# Altium PCB HeatSink.PcbDoc
Units mm, origin at the board's own origin, x right, y up, seen from the top; angles counter-clockwise.
Board outline 150 x 96 mm, 2 copper layers (Top Layer, Bottom Layer); 10 components, 9 nets, 45 pads, 10 vias.
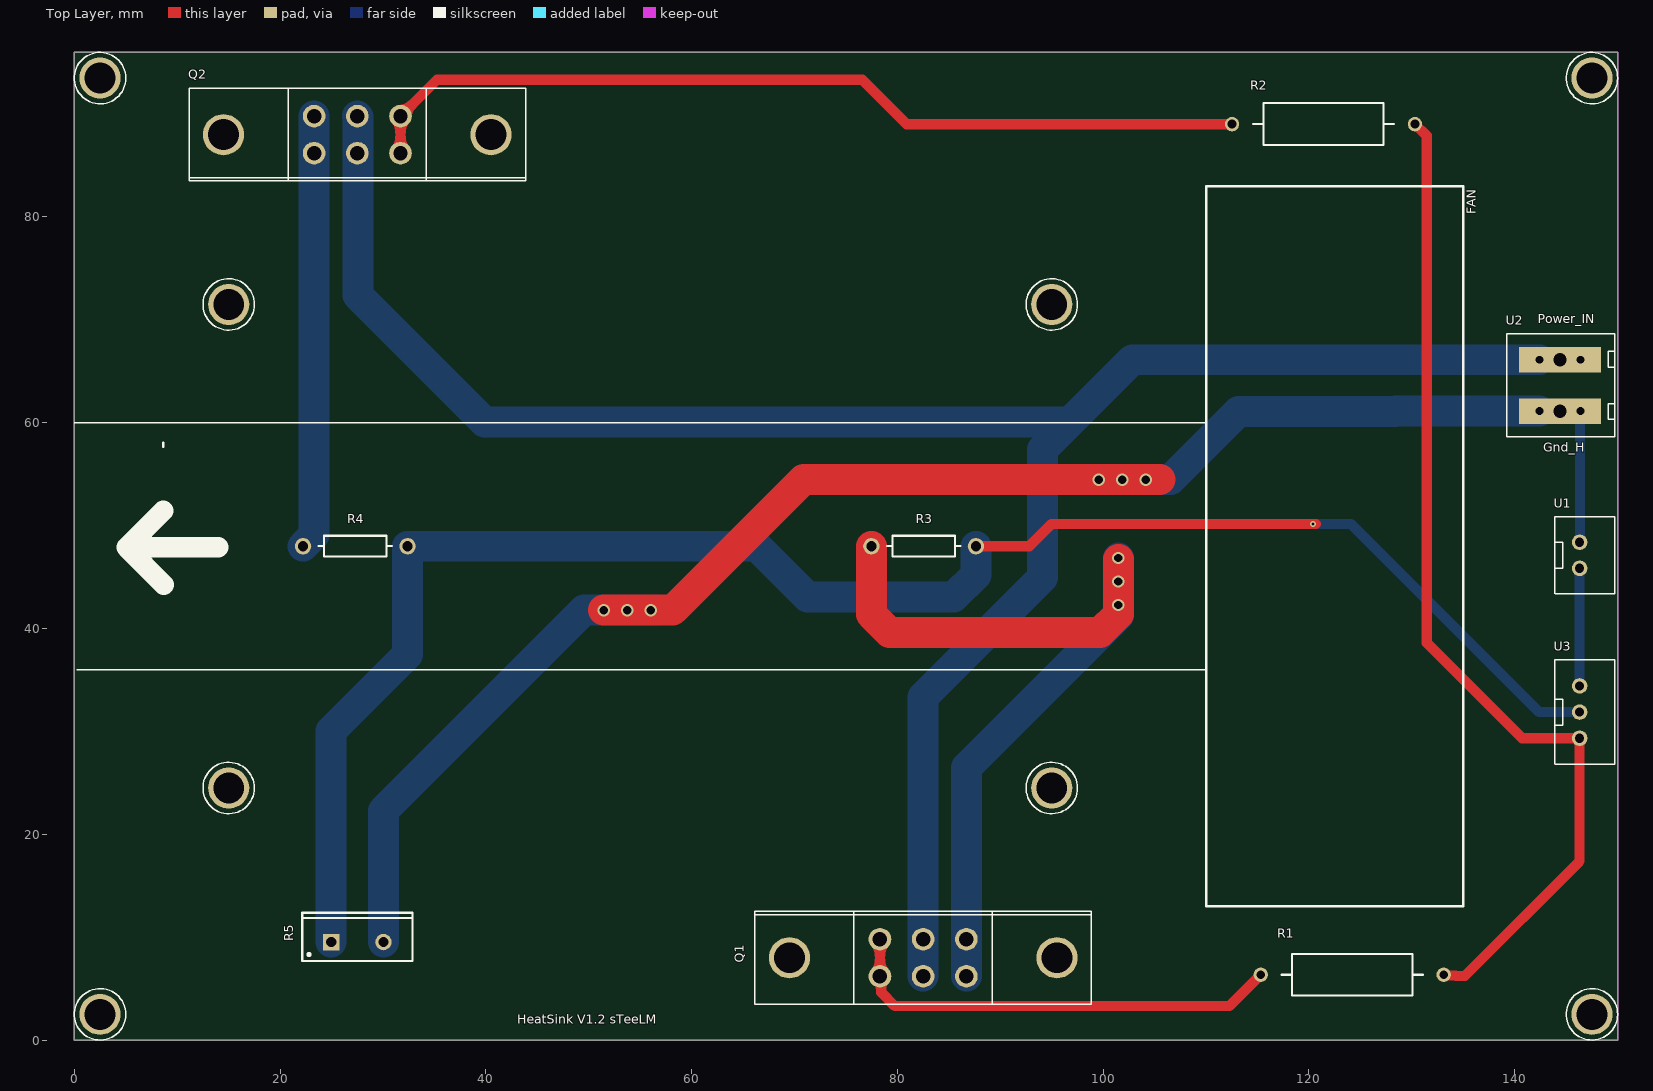
[diagram p0: Top Layer view]
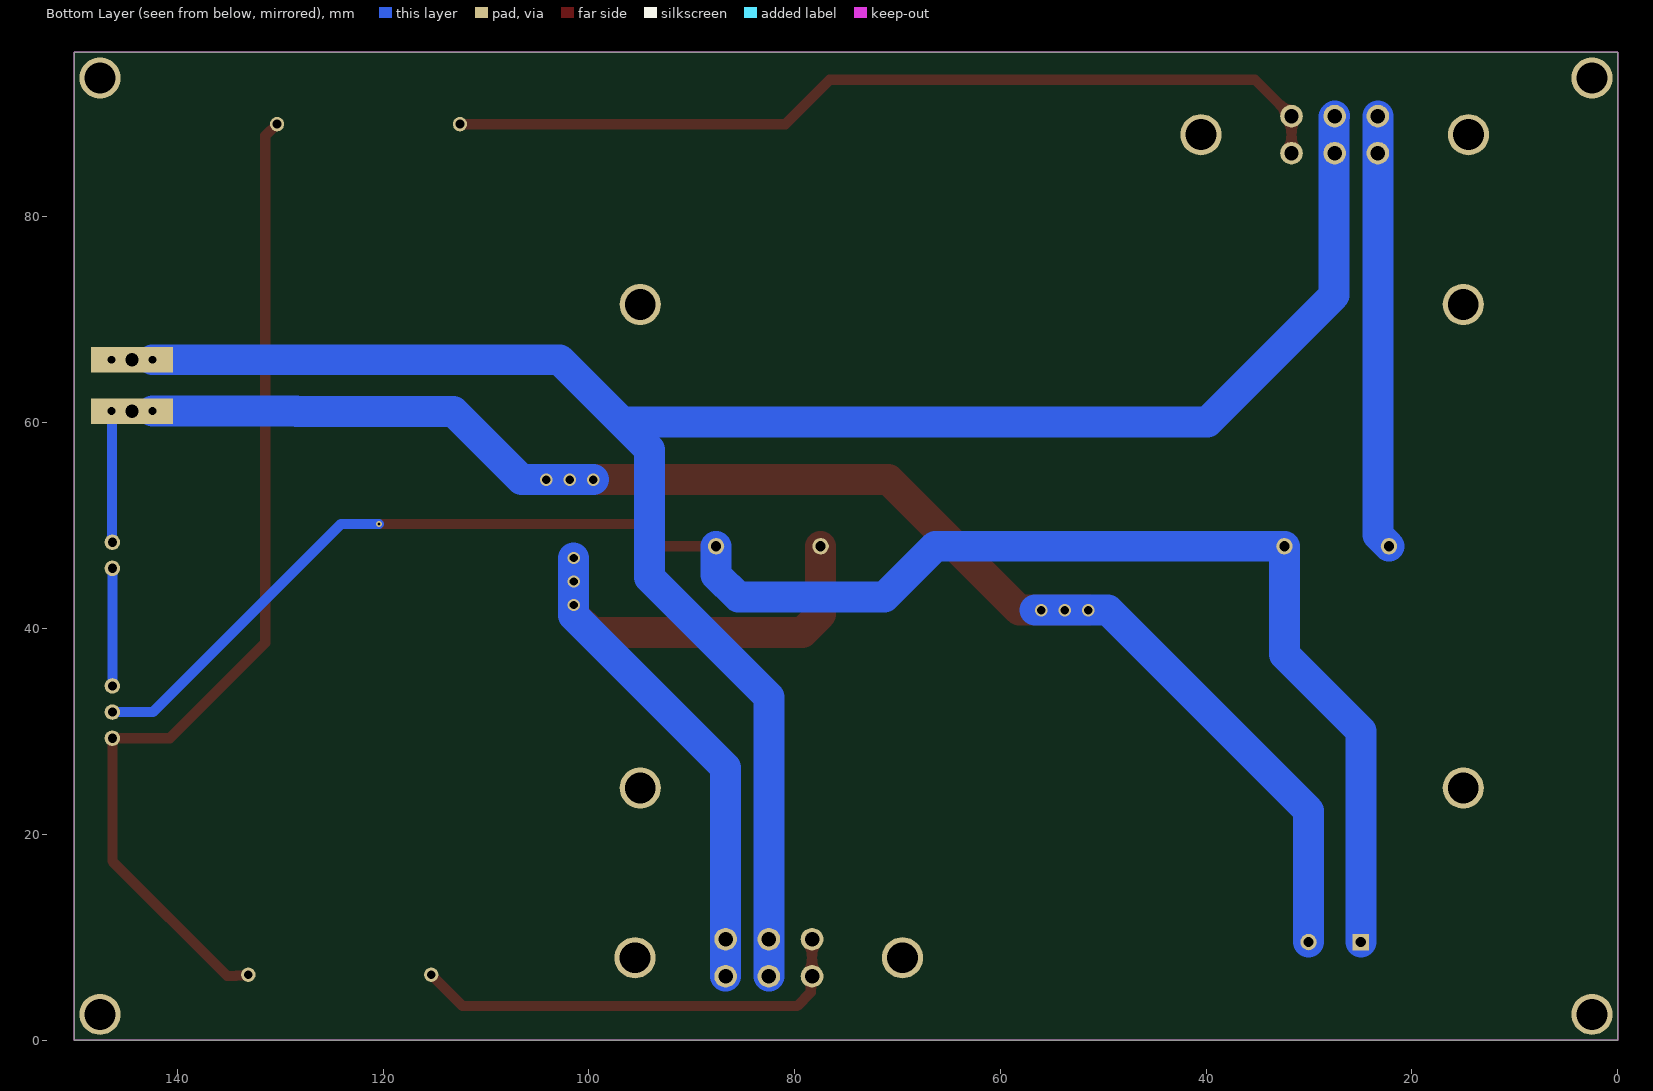
[diagram p1: Bottom Layer view, seen from below]

## Layer stack, top to bottom
Top Solder: solder mask 0.0102, Solder Resist, Dk 3.5
Top Layer: signal copper 0.0356
Dielectric 1: dielectric 0.32, FR-4, Dk 4.8
Bottom Layer: signal copper 0.0356
Bottom Solder: solder mask 0.0102, Solder Resist, Dk 3.5

## Board outline
0,0 0,96 150,96 150,0

## Design rules (kind name [scope] priority, off if disabled: settings)
Clearance [All] p1: gap=1 ignorepadtopadclearanceinfootprint=FALSE except(0.254: Arc-THPad Arc-Hole Track-THPad Track-Hole SMDPad-THPad SMDPad-Hole THPad-THPad THPad-Via THPad-Fill THPad-Poly THPad-Region THPad-Text THPad-Hole Via-Hole Fill-Hole Poly-Hole Region-Hole Text-Hole)
HoleSize [All] p1: absolutevalues=TRUE maxlimit=3 minlimit=0.025 maxpercent=80.000 minpercent=20.000
PolygonConnect [All] p1: connectstyle=Relief reliefconductorwidth=0.254 reliefentries=4 polygonreliefangle="90 Angle" airgapwidth=0.254
RoutingVias [All] p1: holewidth=0.711 width=1.27 viastyle="Through Hole" minholewidth=0.711 minwidth=1.27 maxholewidth=0.711 maxwidth=1.27
SolderMaskExpansion [All] p1: expansion=0.102 istentingtop=FALSE
Width [All] p1: maxlimit=4 minlimit=0.254 preferedwidth=1
29 further rules are at their usual default settings.

## Components (designator, comment, footprint, x,y, rotation, side; value= is the part's Value field where it differs from the comment)
Q1 "TIP3055" TO-247-ZUO 82.5,8 r0 top
Q2 "TIP3055" TO-247-ZUO 27.5,88 r180 top
R1 "1W" AXIAL-0.7 124.206,6.35 r0 top value=200
R2 "1W" AXIAL-0.7 121.412,89.027 r0 top value=200
R3 "5W" AXIAL-0.4-BigHole 82.55,48 r0 top value=0.22R
R4 "5W" AXIAL-0.4-BigHole 27.305,48 r0 top value=0.22R
R5 "35W" "TO-220AB - 2 Legs" 27.5,9.525 r0 top value=0.4R
U1 "NTC" X254-2P 146.304,47.117 r90 top
U2 "POWER2" KF128-50-2P 144.399,63.627 r270 top
U3 "REG3" X254-3P 146.304,31.877 r90 top

## Footprints (in the part's own frame and the unit in brackets; to place one, negate y for a bottom-side part, rotate by r counter-clockwise, add the part's x,y. Pads: shape width x height; smd on the part's side, far side on the other; paste and mask are expansions set on the pad)
AXIAL-0.4-BigHole [mm] "Axial Device, Thru-Hole; 2 Leads; 0.4 in Pin Spacing"
  round 1.6 hole 1: 1(-5.08,0) 2(5.08,0)
  silkscreen extent -3.56,-1.02 3.56,1.02
AXIAL-0.7 [mm] "Axial Device, Thru-Hole; 2 Leads; 0.7 in Pin Spacing"
  round 1.4 hole 0.85: 1(-8.89,0) 2(8.89,0)
  silkscreen extent -6.86,-2.03 6.86,2.03, body extent -7.35,-2.41 7.35,2.39, height 4.9
KF128-50-2P [mm] "KF128-50-2P"
  round 1.524 hole 0.762 mask+0: 1(-2.5,2) 1(-2.5,-2) 2(2.5,2) 2(2.5,-2)
  rect 2.5x8 hole 1.3: 1(-2.5,0) 2(2.5,0)
  silkscreen extent -5,-5.2 5,5.3, body extent -4.95,-5.21 4.95,5.33, height 14
"TO-220AB - 2 Legs" [mm] "TO, Thru-Hole, Vertical, Heatsink Mounted; 3 In-Line Leads; Pitch 2.54 mm, 2 Legs"
  rect 1.6x1.6 hole 1: 1(-2.54,0)
  round 1.6 hole 1: 2(2.54,0)
  silkscreen extent -5.35,-1.85 5.35,2.85, body extent -5.4,-1.9 5.4,2.9, height 19.3
TO-247-ZUO [mm] "TO-247-ZUO"
  round 4 hole 3: 0(-13,0) 0(13,0)
  round 2.2 hole 1.4: 1(-4.2,-1.8) 1(-4.2,1.8) 2(0,-1.8) 2(0,1.8) 3(4.2,-1.8) 3(4.2,1.8)
  silkscreen extent -16.35,-4.5 16.35,4.5
X254-2P [mm] "X254-2P"
  oval 1.5x1.524 hole 0.9: 1(-1.27,0) 2(1.27,0)
  silkscreen extent -3.75,-3.43 3.75,2.41, body extent -3.68,-3.43 3.68,2.29, height 7
X254-3P [mm] "X254-3P"
  oval 1.5x1.524 hole 0.9: 1(-2.54,0) 2(0,0) 3(2.54,0)
  silkscreen extent -5.08,-3.43 5.08,2.41, body extent -5.08,-3.43 5.08,2.29, height 7

## Part data
Q1 Q2: library part NPN, "NPN Bipolar Transistor", Code_JEDEC=TO-226-AA, LatestRevisionDate=17-Jul-2002, LatestRevisionNote="Re-released for DXP Platform.", PackageDescription="TO, Flat Index; 3 In-Line, Axial Leads; Body Dia. 4.8mm; Leads 0.55 x 0.51 mm (max)", PackageReference=TO-226-AA, Published=8-Jun-2000, Publisher="Altium Limited"
R1 R2 R3 R4 R5: library part Res1, "Resistor", LatestRevisionDate=17-Jul-2002, LatestRevisionNote="Re-released for DXP Platform.", PackageDescription="Axial Device, Thru-Hole; 2 Leads; 0.3 in Pin Spacing", PackageReference=AXIAL-0.3, Published=8-Jun-2000, Publisher="Altium Limited"
U3: "REG2"

## Free pads (board coordinates)
  round 4 hole 3: 0(2.5,2.5) 0(2.5,93.5) 0(15,24.5) 0(15,71.5) 0(95,24.5) 0(95,71.5) 0(147.5,2.5) 0(147.5,93.5)

## Via types
v1: diameter 1.2, hole 0.8, Top Layer to Bottom Layer, 9 vias
v2: diameter 0.61, hole 0.305, Top Layer to Bottom Layer, 1 vias

## Nets (pads, with @x,y where several pads share a name; then routed paths per layer and width w, separated by ;. In a path a pad name is that pad's centre, name@x,y a point inside that pad or via, vN(x,y) a via of type N, cw(c..) or ccw(c..) an arc to the next point about the centre after c; other vN are vias at no path point)
GND_H: R5.2 U1.2 U2.2 | length 166.9
  Top Layer w3: v1@51.435,41.783 58.166,41.783 70.866,54.483 v1@100.076,54.483 ; 100.33,54.483 105.537,54.483
  Bottom Layer w0.254: 128.397,61.087 128.437,61.127 ; U2.2@142.399,61.127 U2.2@144.399,61.127 ; U1.2 U1.2@146.352,48.435 ; U2.2@146.352,61.079 U2.2@146.399,61.127
  Bottom Layer w1: U1.2@146.352,48.435 U2.2@146.352,61.079
  Bottom Layer w3: R5.2 30.04,22.293 49.53,41.783 56.642,41.783 ; v1@99.56,54.483 106.553,54.483 113.157,61.087 128.397,61.087 ; 128.437,61.127 U2.2@142.399,61.127
  other v1: 51.443,41.776 53.729,41.776 56.015,41.776 99.56,54.463 101.846,54.463 104.132,54.463
NetQ1_1: Q1.1 R1.1 | length 43.9
  Top Layer w1: Q1.1@78.3,9.8 78.3,6.2 78.417,6.083 78.417,4.641 79.756,3.302 112.268,3.302 R1.1
NetQ1_3: Q1.3 R3.1 | length 84.2
  Top Layer w3: R3.1 77.47,41.381 79.227,39.624 99.709,39.624 101.473,41.388 101.473,45.237 v1@101.473,46.736
  Bottom Layer w3: Q1.3@86.7,6.2 86.7,9.8 86.7,26.502 101.473,41.275 101.473,45.237 101.473,46.736 v1@101.473,46.863
  other v1: 101.466,42.283 101.466,44.569 101.466,46.855
NetQ2_1: Q2.1 R2.1 | length 87.9
  Top Layer w0.254: 83.185,89.154 83.312,89.027
  Top Layer w1: Q2.1@31.7,86.2 31.7,89.8 35.245,93.345 76.581,93.345 80.899,89.027 83.312,89.027 R2.1
NetQ2_3: Q2.3 R4.1 | length 42.2
  Bottom Layer w3: R4.1 23.3,49.075 Q2.3@23.3,89.8
NTC: U1.1 U3.3 | length 11.4
  Bottom Layer w1: U3.3 U1.1
POWER_IN: Q1.2 Q2.2 U2.1 | length 203.7
  Top Layer w0.254: U2.1@142.399,66.127 U2.1@144.399,66.127
  Bottom Layer w0.254: U2.1@142.399,66.127 U2.1@144.399,66.127
  Bottom Layer w3: Q2.2@27.5,89.8 27.559,89.741 27.559,72.39 39.878,60.071 96.774,60.071 ; Q1.2@82.5,6.2 82.5,9.8 82.5,33.351 94.107,44.958 94.107,57.404 96.774,60.071 ; U2.1@142.399,66.127 102.83,66.127 96.774,60.071
POWER_REG: R1.2 R2.2 U3.1 | length 99.4
  Top Layer w1: R2.2 131.445,87.884 131.445,38.608 140.716,29.337 U3.1 146.304,17.399 135.128,6.223 134.3,6.223 134.249,6.273 133.173,6.273 R1.2
SAMPLE_C: R3.2 R4.2 R5.1 U3.2 | length 169.9
  Top Layer w1: R3.2 92.831,48 94.996,50.165 v2@120.65,50.165
  Bottom Layer w1: v2(120.396,50.165) 124.079,50.165 142.367,31.877 U3.2
  Bottom Layer w3: R5.1 24.96,30.04 32.385,37.465 R4.2 66.3,48 71.247,43.053 85.471,43.053 87.63,45.212 R3.2
pads on no net: Q1.0 Q2.0

## Keep-outs
Keep-Out Layer:
  the board outline again, w0.127

## Silkscreen, mask and mechanical layers (free items; w line width, h text height)
Top Overlay:
  circle w0.127: c95,24.5 r2.5
  circle w0.127: c95,71.5 r2.5
  circle w0.127: c15,24.5 r2.5
  circle w0.127: c15,71.5 r2.5
  circle w0.127: c147.5,2.5 r2.5
  circle w0.127: c147.5,93.5 r2.5
  circle w0.127: c2.5,93.5 r2.5
  circle w0.127: c2.5,2.5 r2.5
  lines w0.127: 0,60 110.109,60 ; 0.254,36 110.109,36
  lines w0.254: 8.636,57.658 8.636,58.039 ; 110,13 135,13 135,83 110,83 110,13
  lines w2: 8.636,51.435 5.08,47.879 ; 8.7,44.259 5.08,47.879 ; 13.97,47.879 5.08,47.879
  text "FAN" at 136.525,80.264 h1.52 r90
  text "Power_IN" at 142.24,69.359 h1.52
  text "Gnd_H" at 142.748,56.913 h1.52
  text "HeatSink V1.2 sTeeLM" at 43.053,1.286 h1.52
Top Solder:
  lines w3: 51.181,41.783 58.166,41.783 70.866,54.483 106.045,54.483 ; 77.47,48 77.47,41.402 78.232,40.64 79.248,39.624 99.695,39.624 101.473,41.402 101.473,47.244
Bottom Solder:
  lines w0.254: 23.3,86.2 23.368,86.132 ; 27.466,72.483 27.627,72.644 27.5,72.195 ; 82.423,9.877 82.5,9.8 ; 85.598,43.053 85.598,43.307 ; 86.614,9.886 86.7,9.8 ; 142.399,61.127 146.399,61.127
  lines w3: 22.225,48 23.368,49.143 23.368,86.132 ; 23.3,86.2 23.3,89.8 ; 24.96,9.525 24.96,30.04 32.385,37.465 32.385,48 66.173,48 71.12,43.053 85.598,43.053 87.63,45.085 87.63,48 ; 27.466,72.483 39.878,60.071 96.647,60.071 ; 27.5,89.8 27.627,85.819 27.627,72.644 ; 30.04,9.525 30.04,22.166 49.657,41.783 56.769,41.783 ; 82.423,9.877 82.423,33.274 94.107,44.958 94.107,57.277 96.647,59.817 102.957,66.127 142.399,66.127 ; 82.5,6.2 82.5,9.8 ; 86.614,9.886 86.614,26.289 101.473,41.148 101.473,47.244 ; 86.7,6.2 86.7,9.8 ; 99.56,54.483 106.553,54.483 113.197,61.127 142.399,61.127
Mechanical 13:
  lines w0.127: 27.5,13.081 27.5,82.931 ; 55,12.954 55,82.804 ; 82.5,1.143 82.5,95.631
  lines w0.254: 0,13 110,13 110,83 0,83 0,13